# Altium PCB 指纹.pcbdoc
Units mil, origin at the board's own origin, x right, y up, seen from the top; angles counter-clockwise.
Board outline 3582.68 x 3149.61 mil, 2 copper layers (Top Layer, Bottom Layer); 26 components, 51 nets, 158 pads, 32 vias.
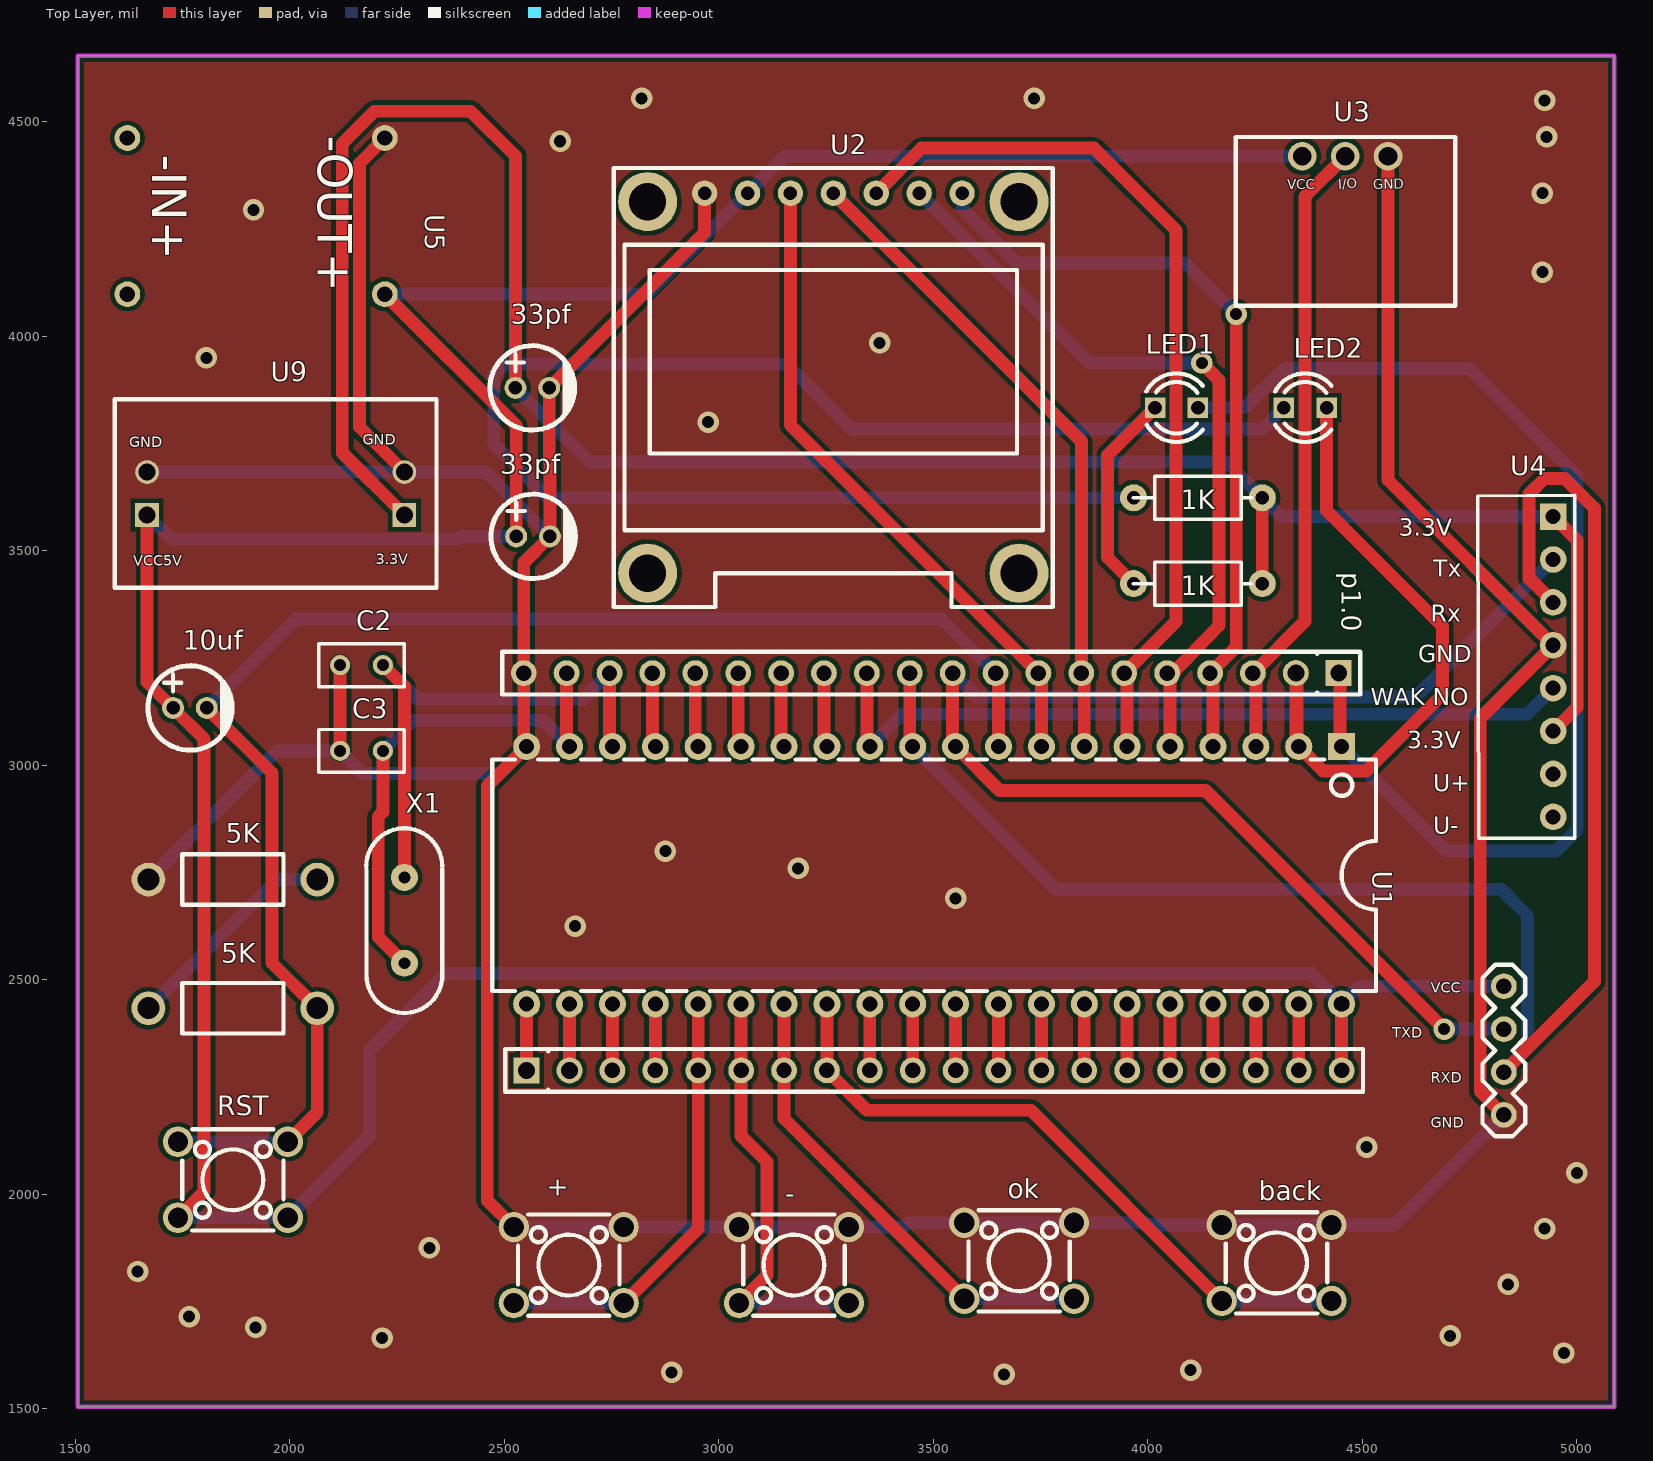
[diagram p0: Top Layer view]
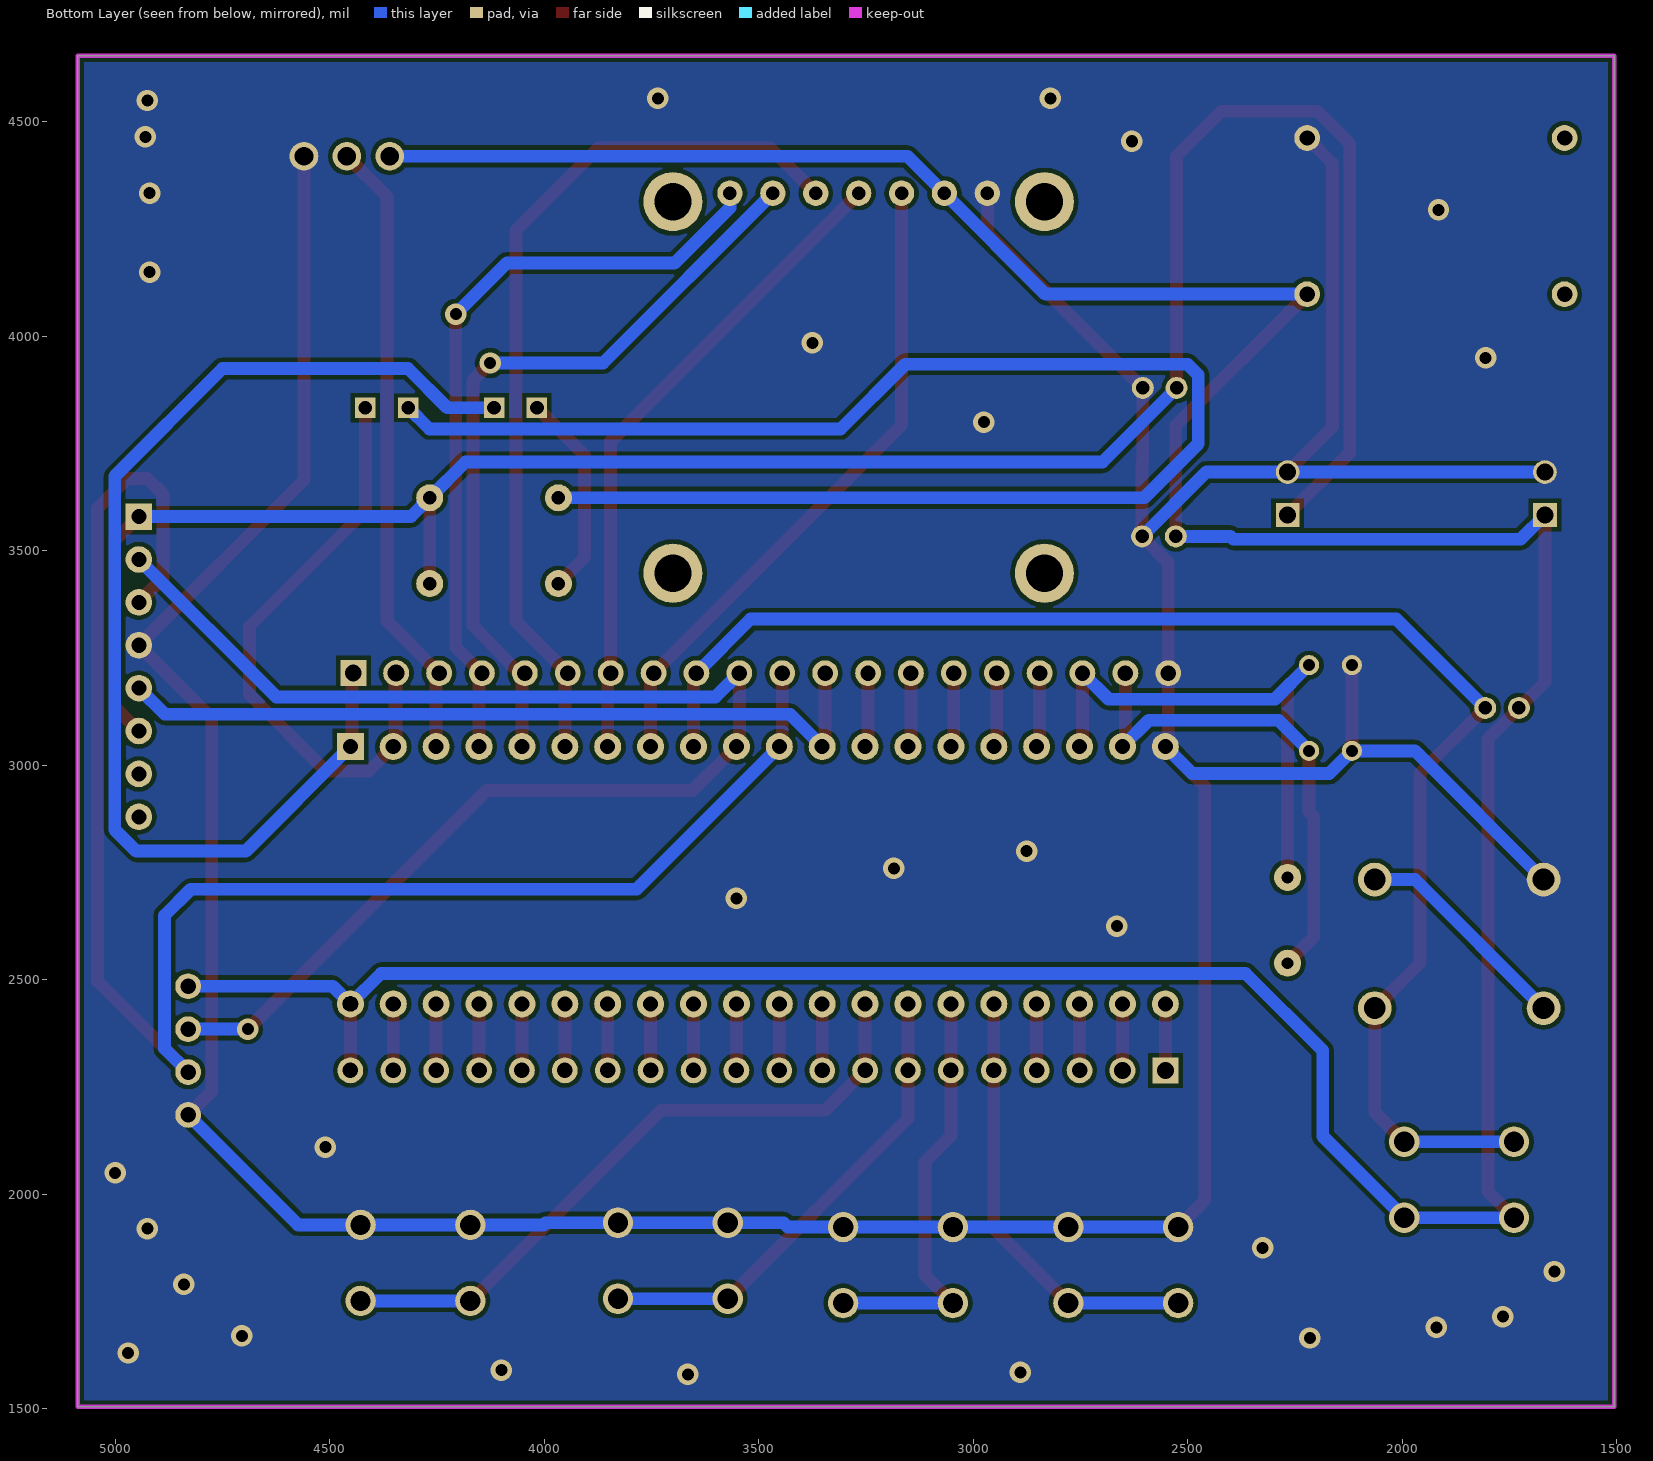
[diagram p1: Bottom Layer view, seen from below]

## Layer stack, top to bottom
Top Solder: solder mask 0.4, Solder Resist, Dk 3.5
Top Layer: signal copper 1.4
Dielectric1: dielectric 12.6, FR-4, Dk 4.8
Bottom Layer: signal copper 1.4
Bottom Solder: solder mask 0.4, Solder Resist, Dk 3.5

## Board outline
1505,1505 5087.68,1505 5087.68,4654.61 1505,4654.61

## Design rules (kind name [scope] priority, off if disabled: settings)
Clearance [All] p1: gap=10 ignorepadtopadclearanceinfootprint=FALSE
PolygonConnect [All] p1: connectstyle=Direct reliefconductorwidth=10 reliefentries=4 polygonreliefangle="90 Angle" airgapwidth=10
RoutingVias [All] p1: holewidth=28 width=50 viastyle="Through Hole" minholewidth=28 minwidth=50 maxholewidth=28 maxwidth=50
SilkToSolderMaskClearance [IsPad] p1: minsilkscreentomaskgap=0 clearancetoexposedcopper=TRUE
SolderMaskExpansion [All] p1: expansion=4
Width [All] p1: maxlimit=33 minlimit=28 preferedwidth=30
29 further rules are at their usual default settings.

## Components (designator, comment, footprint, x,y, rotation, side; value= is the part's Value field where it differs from the comment)
1 "DIP" DIP-2.54-20X1 3495,3215 r180 top
2 "DIP" DIP-2.54-20X1 3501.84,2288.77 r0 top
5K "5k" ?#1 1866.84,2433.77 r0 top (schematic designator R3)
5K "5k" ?#1 1866.84,2733.77 r0 top (schematic designator R1)
10uf "10uF" CAP-TH_BD5.0-P2.00-D0.8-FD 1766.84,3133.77 r0 top (schematic designator C1)
33pf "10uF" CAP-TH_BD5.0-P2.00-D0.8-FD 2565,3880 r0 top (schematic designator C4)
33pf "10uF" CAP-TH_BD5.0-P2.00-D0.8-FD 2566.84,3533.77 r0 top (schematic designator C5)
+ "SW2" SW-DIP-4P-L6.0-P4.5-W6.0-LS6.5 2650,1835 r0 top (schematic designator SW2)
- "SW3" SW-DIP-4P-L6.0-P4.5-W6.0-LS6.5 3175,1835 r0 top (schematic designator SW3)
back "SW5" SW-DIP-4P-L6.0-P4.5-W6.0-LS6.5 4300,1840 r0 top (schematic designator SW5)
C2 "33pF" RAD-0.1 2166.84,3233.77 r0 top
C3 "33pF" RAD-0.1 2166.84,3033.77 r0 top
LED1 "LED_LED3MM" LED_LED3MM 4066.84,3833.77 r0 top
LED2 "LED_LED3MM" LED_LED3MM 4366.84,3833.77 r0 top
ok "SW4" SW-DIP-4P-L6.0-P4.5-W6.0-LS6.5 3700,1845 r0 top (schematic designator SW4)
p1.0 "1K电阻原理图" ?#2 4866.84,2933.77 r0 top (schematic designator U6)
RST "SW" SW-DIP-4P-L6.0-P4.5-W6.0-LS6.5 1866.84,2033.77 r0 top (schematic designator SW1)
U1 "单片机芯片元件03边一凡" STC89C52RC 3466.84,2733.77 r270 top
U2 "OLED-7PIN" OLED-7PIN 3266.84,3933.77 r0 top
U3 "" ?#3 4460,4420 r0 top
U4 "AS608" AS608 4945,3230 r0 top
U5 "5V DC电源模块" ?#4 2366.84,4233.77 r270 top
U7 "1K电阻原理图" ?#2 4866.84,3133.77 r0 top
U9 "REG-AMS1117-3.3V" REG-AMS1117 1966.84,3633.77 r0 top
X1 "11.0592M" 11.0592M 2266.84,2533.77 r0 top
? "排针" ?#5 4830,2335 r90 top

## Footprints (in the part's own frame and the unit in brackets; to place one, negate y for a bottom-side part, rotate by r counter-clockwise, add the part's x,y. Pads: shape width x height; smd on the part's side, far side on the other; paste and mask are expansions set on the pad)
11.0592M [mm]
  round 1.6 hole 0.7: 1(0,5.207) 2(0,0.127)
  silkscreen extent -2.26,-2.82 2.25,8.11
AS608 [mil]
  rect 62x62 hole 35: 1(0,350)
  round 62 hole 35: 2(0,250) 3(0,150) 4(0,50) 5(0,-50) 6(0,-150) 7(0,-250) 8(0,-350)
  silkscreen extent -176,-400 50,400
CAP-TH_BD5.0-P2.00-D0.8-FD [mm]
  round 1.3 hole 0.8: 1(-1,0) 2(1,0)
  silkscreen extent -2.5,-2.5 2.5,2.5
DIP-2.54-20X1 [mil]
  rect 60.63x60.63 hole 39.37: 1(-950,0)
  round 60.63 hole 39.37: 2(-850,0)
  round 60 hole 36: 3(-750,0) 4(-650,0) 5(-550,0) 6(-450,0) 7(-350,0) 8(-250,0) 9(-150,0) 10(-50,0) 11(50,0) 12(150,0) 13(250,0) 14(350,0) 15(450,0) 16(550,0) 17(650,0) 18(750,0) 19(850,0) 20(950,0)
  silkscreen extent -1000,-50 1000,50
LED_LED3MM [mil]
  rect 47.7x47.7 hole 32: A(-50,0) K(50,0)
  silkscreen extent -71,-80 61,80
OLED-7PIN [mm]
  round 3.5 hole 2.2: 0(-11,-12.34) 0(-11,9.66) 0(11,-12.34) 0(11,9.66)
  round 1.5 hole 0.8: 1(-7.62,10.16) 2(-5.08,10.16) 3(-2.54,10.16) 4(0,10.16) 5(2.54,10.16) 6(5.08,10.16) 7(7.62,10.16)
  silkscreen extent -13,-14.34 13,11.66
RAD-0.1 [mil]
  round 47 hole 28: 1(-50,0) 2(50,0)
  silkscreen extent -100,-50 100,50
REG-AMS1117 [mil]
  rect 55.1x55.1 hole 39.4: J1.1(-300,-50) J2.1(300,-50)
  round 55.1 hole 39.4: J1.2(-300,50) J2.2(300,50)
  silkscreen extent -375,-220 375,220
STC89C52RC [mil]
  rect 63x63 hole 35: 1(-310,985)
  round 63 hole 35: 2(-310,885) 3(-310,785) 4(-310,685) 5(-310,585) 6(-310,485) 7(-310,385) 8(-310,285) 9(-310,185) 10(-310,85) 11(-310,-15) 12(-310,-115) 13(-310,-215) 14(-310,-315) 15(-310,-415) 16(-310,-515) 17(-310,-615) 18(-310,-715) 19(-310,-815) 20(-310,-915) 21(290,-915) 22(290,-815) 23(290,-715) 24(290,-615) 25(290,-515) 26(290,-415) 27(290,-315) 28(290,-215) 29(290,-115) 30(290,-15) 31(290,85) 32(290,185) 33(290,285) 34(290,385) 35(290,485) 36(290,585) 37(290,685) 38(290,785) 39(290,885)
  round 63 hole 35 slot 36.75 at 90 deg: 40(290,985)
  silkscreen extent -280,-995 260,1065
SW-DIP-4P-L6.0-P4.5-W6.0-LS6.5 [mm]
  round 1.8 hole 1.2: 1(-3.25,2.25) 1(3.25,2.25) 2(-3.25,-2.25) 2(3.25,-2.25)
  silkscreen extent -3,-3 3,3
?#1 [mm]
  round 2 hole 1.3: 1(-5,0) 2(5,0)
  silkscreen extent -3,-1.5 3,1.5
?#2 [mm]
  round 1.6 hole 0.8: 1(-22.86,12.446) 2(-15.24,12.446)
  silkscreen extent -22.89,11.17 -15.85,13.73
?#3 [mm]
  round 1.7 hole 1.1: 1(-2.54,0) 2(0,0) 3(2.54,0)
  silkscreen extent -6.48,-8.86 6.52,1.14
?#4 [mm]
  round 1.524 hole 0.914: 1(-5.812,-18.946) 2(3.437,-18.946) 3(3.437,-3.698) 4(-5.812,-3.698)
?#5 [mm]
  round 1.524 hole 0.914: 1(-3.81,0) 2(-1.27,0) 3(1.27,0) 4(3.81,0)
  silkscreen extent -5.08,-1.27 5.08,1.27

## Via types
v1: diameter 50, hole 28, Top Layer to Bottom Layer, 32 vias

## Nets (pads, with @x,y where several pads share a name; then routed paths per layer and width w, separated by ;. In a path a pad name is that pad's centre, name@x,y a point inside that pad or via, vN(x,y) a via of type N, cw(c..) or ccw(c..) an arc to the next point about the centre after c; other vN are vias at no path point)
ALE: 2.10 U1.30 | length 155
  Top Layer w30: 2.10 U1.30
EA: 2.11 U1.31 | length 155
  Top Layer w30: 2.11 U1.31
GND: 1.20 5K.1@1669.99,2733.77 33pf.2 +.1 -.1 ?.1 back.1 C2.1 C3.1 ok.1 U1.20 U2.1 U3.3 U4.4 U5.4 U9.J1.2 U9.J2.2 | length 10663.3
  Top Layer w30: C3.1 C2.1 ; U5.4 2162,4403.33 2162,3788.62 U9.J2.2 ; +.1@2522.05,1923.58 2460,1985.63 2460,2951.93 U1.20 2545,3050.62 1.20 2545,3472.56 2606.21,3533.77 2606.21,3705 2604.37,3706.84 2604.37,3880 2966.85,4242.48 U2.1 ; U3.3 4560,3665 U4.4 4775,3110 4775,2240 ?.1
  Bottom Layer w30: U9.J1.2 U9.J2.2 2456.21,3683.77 33pf.2@2606.21,3533.77 ; 5K.1@1669.99,2733.77 1969.99,3033.77 C3.1 2169.62,2981 2489.07,2981 U1.20 ; +.1@2522.05,1923.58 2777.95,1923.58 3047.05,1923.58 3302.95,1923.58 3432,1923.58 3442,1933.58 3572.05,1933.58 3827.95,1933.58 3997,1933.58 4002,1928.58 4172.05,1928.58 4427.95,1928.58 4573.58,1928.58 ?.1
  other v1: 3665,1580 2890,1585 4100,1590 4970,1630 2215,1665 4705,1670 1920,1690 1765,1715 4840,1790 1645,1820 2325,1875 4925,1920 5000,2050 4510,2110 2665,2625 3551.84,2690 3185,2760 2875,2800 2975,3800 1805,3950 3375,3985 4920,4150 1915,4295 4920,4333.78 2630,4455 4930,4465 4925,4550 2820,4555 3735,4555
LED1_A: LED1.A p1.0.1 | length 481.1
  Top Layer w30: p1.0.1 3906,3484.62 3906,3722.93 LED1.A
LED2_A: LED2.A U7.1 | length 3639.5
  Bottom Layer w30: U7.1 2601.23,3623.77 2475,3750 2475,3910 2500,3935 3158,3935 3309,3784 4267.07,3784 LED2.A
P0.0: 2.19 U1.39 | length 155
  Top Layer w30: 2.19 U1.39
P0.1: 2.18 U1.38 | length 155
  Top Layer w30: 2.18 U1.38
P0.2: 2.17 U1.37 | length 155
  Top Layer w30: 2.17 U1.37
P0.3: 2.16 U1.36 | length 155
  Top Layer w30: 2.16 U1.36
P0.4: 2.15 U1.35 | length 155
  Top Layer w30: 2.15 U1.35
P0.5: 2.14 U1.34 | length 155
  Top Layer w30: 2.14 U1.34
P0.6: 2.13 U1.33 | length 155
  Top Layer w30: 2.13 U1.33
P0.7: 2.12 U1.32 | length 155
  Top Layer w30: 2.12 U1.32
P1.0: 1.1 LED1.K U1.1 | length 2694.8
  Top Layer w30: 1.1 4448.42,3211.58 4448.42,3047.2 U1.1
  Bottom Layer w30: LED1.K 4226,3833.77 4317.23,3925 4750,3925 5001,3674 5001,2850 4951,2800 4695.62,2800 U1.1
P1.1: 1.2 LED2.K U1.2 | length 1556.4
  Top Layer w30: LED2.K 4416.84,3594.16 4687,3324 4687,3165 4509,2987 4408.62,2987 U1.2 U1.2@4348.42,3047.2 ; U1.2@4348.42,3047.2 4345,3050.62 1.2 4348.42,3211.58 U1.2@4348.42,3047.2
P1.2: 1.3 U1.3 U3.2 | length 1468.1
  Top Layer w30: U1.3 4251.84,3208.16 1.3 4366,3336 4366,4326 U3.2
P1.3: 1.4 U1.4 U2.7 | length 1812
  Top Layer w30: U1.4 4151.84,3208.16 1.4 4206,3276 v1(4206,4052)
  Bottom Layer w30: U2.7 3566.85,4300 3695.85,4171 4087,4171 v1(4206,4052)
P1.4: 1.5 U1.5 U2.6 | length 1953.9
  Top Layer w30: 1.5 1.5@4051.84,3208.16 ; U1.5 1.5@4051.84,3208.16 ; v1(4126,3938) 4150,3914 4166,3898 4166,3326 ; 1.5@4051.84,3208.16 1.5@4051.95,3208.27 ; 1.5@4051.84,3208.16 4051.91,3208.22 1.5@4051.95,3208.27 ; 1.5@4051.95,3208.27 4166,3326 ; 1.5@4051.95,3208.27 4166,3326
  Bottom Layer w30: U2.6 3862.62,3938 v1(4126,3938)
P1.5: 1.6 U1.6 U2.5 | length 2082.5
  Top Layer w30: U2.5 3472.07,4439 3874,4439 4066,4247 4066,3336 1.6@3951.84,3221.84 ; 1.6 1.6@3951.84,3221.84 ; U1.6 3951.84,3215 1.6@3951.84,3221.84
P1.6: 1.7 U1.7 U2.4 | length 1532.3
  Top Layer w30: U2.4 3845,3755.62 1.7 3851.84,3208.16 U1.7
P1.7: 1.8 U1.8 U2.3 | length 1546
  Top Layer w30: U2.3 3166.85,3793.15 1.8 3751.84,3221.84 3751.84,3215 U1.8
P2.0: 2.1 U1.21 | length 155
  Top Layer w30: 2.1 U1.21
P2.1: 2.2 U1.22 | length 155
  Top Layer w30: 2.2 U1.22
P2.2: 2.3 U1.23 | length 155
  Top Layer w30: 2.3 U1.23
P2.3: 2.4 U1.24 | length 155
  Top Layer w30: 2.4 U1.24
P2.4: 2.5 +.2 U1.25 | length 1025.3
  Top Layer w30: +.2@2777.95,1746.42 2951.84,1920.31 2.5 U1.25
  Bottom Layer w30: +.2@2522.05,1746.42 +.2@2777.95,1746.42
P2.5: 2.6 -.2 U1.26 | length 1005.1
  Top Layer w30: -.2@3047.05,1746.42 3112,1811.37 3112,2076 3051.84,2136.16 2.6 U1.26
  Bottom Layer w30: -.2@3047.05,1746.42 -.2@3302.95,1746.42
P2.6: 2.7 ok.2 U1.27 | length 1117.3
  Top Layer w30: U1.27 2.7 3151.84,2176.62 ok.2@3572.05,1756.42
  Bottom Layer w30: ok.2@3572.05,1756.42 ok.2@3827.95,1756.42
P2.7: 2.8 back.2 U1.28 | length 1553.7
  Top Layer w30: U1.28 2.8 3344.62,2196 3727.47,2196 back.2@4172.05,1751.42
  Bottom Layer w30: back.2@4172.05,1751.42 back.2@4427.95,1751.42
P3.2: 1.12 U1.12 U4.5 | length 1823.6
  Top Layer w30: 1.12 3345,3050.62 U1.12
  Bottom Layer w30: U1.12 3427.07,3119 4884,3119 U4.5
P3.3: 1.13 U1.13 | length 174.1
  Top Layer w30: 1.13 3245,3050.62 U1.13
P3.4: 1.14 U1.14 | length 174.1
  Top Layer w30: 1.14 3145,3050.62 U1.14
P3.5: 1.15 U1.15 | length 174.1
  Top Layer w30: 1.15 3045,3050.62 U1.15
P3.6: 1.16 U1.16 | length 174.1
  Top Layer w30: 1.16 2945,3050.62 U1.16
P3.7: 1.17 U1.17 | length 174.1
  Top Layer w30: 1.17 2845,3050.62 U1.17
PSEN: 2.9 U1.29 | length 155
  Top Layer w30: 2.9 U1.29
R3_1: 5K.1@1669.99,2433.77 5K.2@2063.69,2733.77 | length 518
  Bottom Layer w30: 5K.1@1669.99,2433.77 1969.99,2733.77 5K.2@2063.69,2733.77
RST: 1.9 5K.2@2063.69,2433.77 10uf.2 RST.1 U1.9 | length 3553.4
  Top Layer w30: 10uf.2 1958,2981.99 1958,2539.47 2063.69,2433.77 2063.69,2191.25 RST.1@1994.8,2122.36 ; 1.9 3651.84,3208.16 U1.9
  Bottom Layer w30: RST.1@1738.89,2122.36 RST.1@1994.8,2122.36 ; 10uf.2 2013.44,3341 3519,3341 1.9
RX: 1.11 ?.2 U1.11 U4.3 | length 4032.2
  Top Layer w30: 1.11 3445,3050.62 U1.11 ; ?.2 5041,2496 5041,3600 4972,3669 4925,3669 4889,3633 4889,3436 U4.3
  Bottom Layer w30: U1.11 3784.62,2711 4824,2711 4885,2650 4885,2340 ?.2
S$20: 
S$30: 
S$32: 
TX: 1.10 ?.3 U1.10 U4.2 | length 3280.7
  Top Layer w30: 1.10 3545,3050.62 U1.10 3654.62,2941 4135,2941 v1(4691,2385)
  Bottom Layer w30: 1.10 3600.32,3159.68 4624.68,3159.68 U4.2 ; v1(4691,2385) ?.3
U4_7: U4.7
U4_8: U4.8
U5_1: U5.1
U5_2: U5.2
VCC: 2.20 10uf.1 33pf.1@2527.47,3533.77 ?.4 RST.2 U1.40 U2.2 U3.1 U5.3 U9.J1.1 | length 9215.1
  Top Layer w30: U9.J1.1 1666.84,3194.4 10uf.1 1800,3061.25 1800,2006.3 RST.2@1738.89,1945.19 ; U5.3 2527.47,3792.24 33pf.1@2527.47,3533.77 ; 2.20 U1.40
  Bottom Layer w30: U9.J1.1 1723.62,3527 2393,3527 2399.77,3533.77 33pf.1@2527.47,3533.77 ; RST.2@1738.89,1945.19 1994.8,1945.19 2185,2135.39 2185,2335 2365,2515 4380.62,2515 U1.40 4493.07,2485 ?.4 ; U5.3 2831.54,4098.47 U2.2 3153.07,4420 U3.1
VCC3.3V: 33pf.1@2525.63,3880 p1.0.2 U4.1 U4.6 U7.2 U9.J2.1 | length 5234.7
  Top Layer w30: U9.J2.1 2122,3728.62 2122,4450 2197,4525 2421,4525 2525.63,4420.37 33pf.1@2525.63,3880 ; p1.0.2 U7.2 ; U4.6 5001,3136 5001,3524 U4.1
  Bottom Layer w30: 33pf.1@2525.63,3880 2698.63,3707 4183.62,3707 U7.2 4310.62,3580 U4.1
X1: 1.19 C3.2 U1.19 X1.2 | length 1188.6
  Top Layer w30: C3.2 2216.84,2891 2206,2880.16 2206,2599.61 X1.2 ; 1.19 2645,3050.62 U1.19
  Bottom Layer w30: C3.2 2288.07,3105 2590.62,3105 U1.19
X2: 1.18 C2.2 U1.18 X1.1 | length 1276.2
  Top Layer w30: C2.2 2266.84,3183.77 X1.1 ; 1.18 2745,3050.62 U1.18
  Bottom Layer w30: C2.2 2296.62,3154 2684,3154 1.18
pads on no net: U2.0

## Polygon pours and split planes (outlines as drawn)
GND on Top Layer "GND_L01_P000" (solid, remove dead copper, pour order 0): 1505,4654.61 5087.68,4654.61 5087.68,1505 1505,1505
GND on Bottom Layer "GND_L02_P002" (solid, remove dead copper, pour order 2): 1505,4654.61 5087.68,4654.61 5087.68,1505 1505,1505

## Keep-outs
Keep-Out Layer:
  the board outline again, w10

## Silkscreen, mask and mechanical layers (free items; w line width, h text height)
Top Overlay:
  text "GND" at 2170,3747.49 h25
  text "GND" at 1625,3741.6 h25
  text "3.3V" at 2200,3468.77 h25
  text "VCC5V" at 1635,3465 h25
  text "VCC" at 4660,2470 h25
  text "TXD" at 4570,2365 h25
  text "RXD" at 4660,2260 h25
  text "GND" at 4660,2155 h25

## Text inside footprints (layer, text, board x,y; h text height)
p1.0: Top Overlay "1K" at 4076.84,3396.77 h45
U3: Top Overlay "GND" at 4525,4335 h39.37 r1; Top Overlay "I/O" at 4445,4335 h39.37 r4; Top Overlay "VCC" at 4325,4335 h39.37
U4: Top Overlay "3.3V" at 4585,3535 h40; Top Overlay "3.3V" at 4605,3040 h40; Top Overlay "GND" at 4630,3240 h40; Top Overlay "Tx" at 4665,3440 h40; Top Overlay "Rx" at 4660,3335 h40; Top Overlay "WAK NO" at 4520,3140 h40; Top Overlay "U+" at 4665,2940 h40; Top Overlay "U-" at 4665,2840 h40
U5: Top Overlay "-IN+" at 1679.34,4423.17 h80 r270; Top Overlay "-OUT+" at 2065.24,4468.27 h80 r270
U7: Top Overlay "1K" at 4076.84,3596.77 h45